# Altium PCB 2331new.PcbDoc
Units mm, origin at the board's own origin, x right, y up, seen from the top; angles counter-clockwise.
Board outline 105 x 90 mm, 2 copper layers (Top Layer, Bottom Layer); 19 components, 48 nets, 138 pads, 6 vias.
Unrouted connection lines stored in the file: 14.
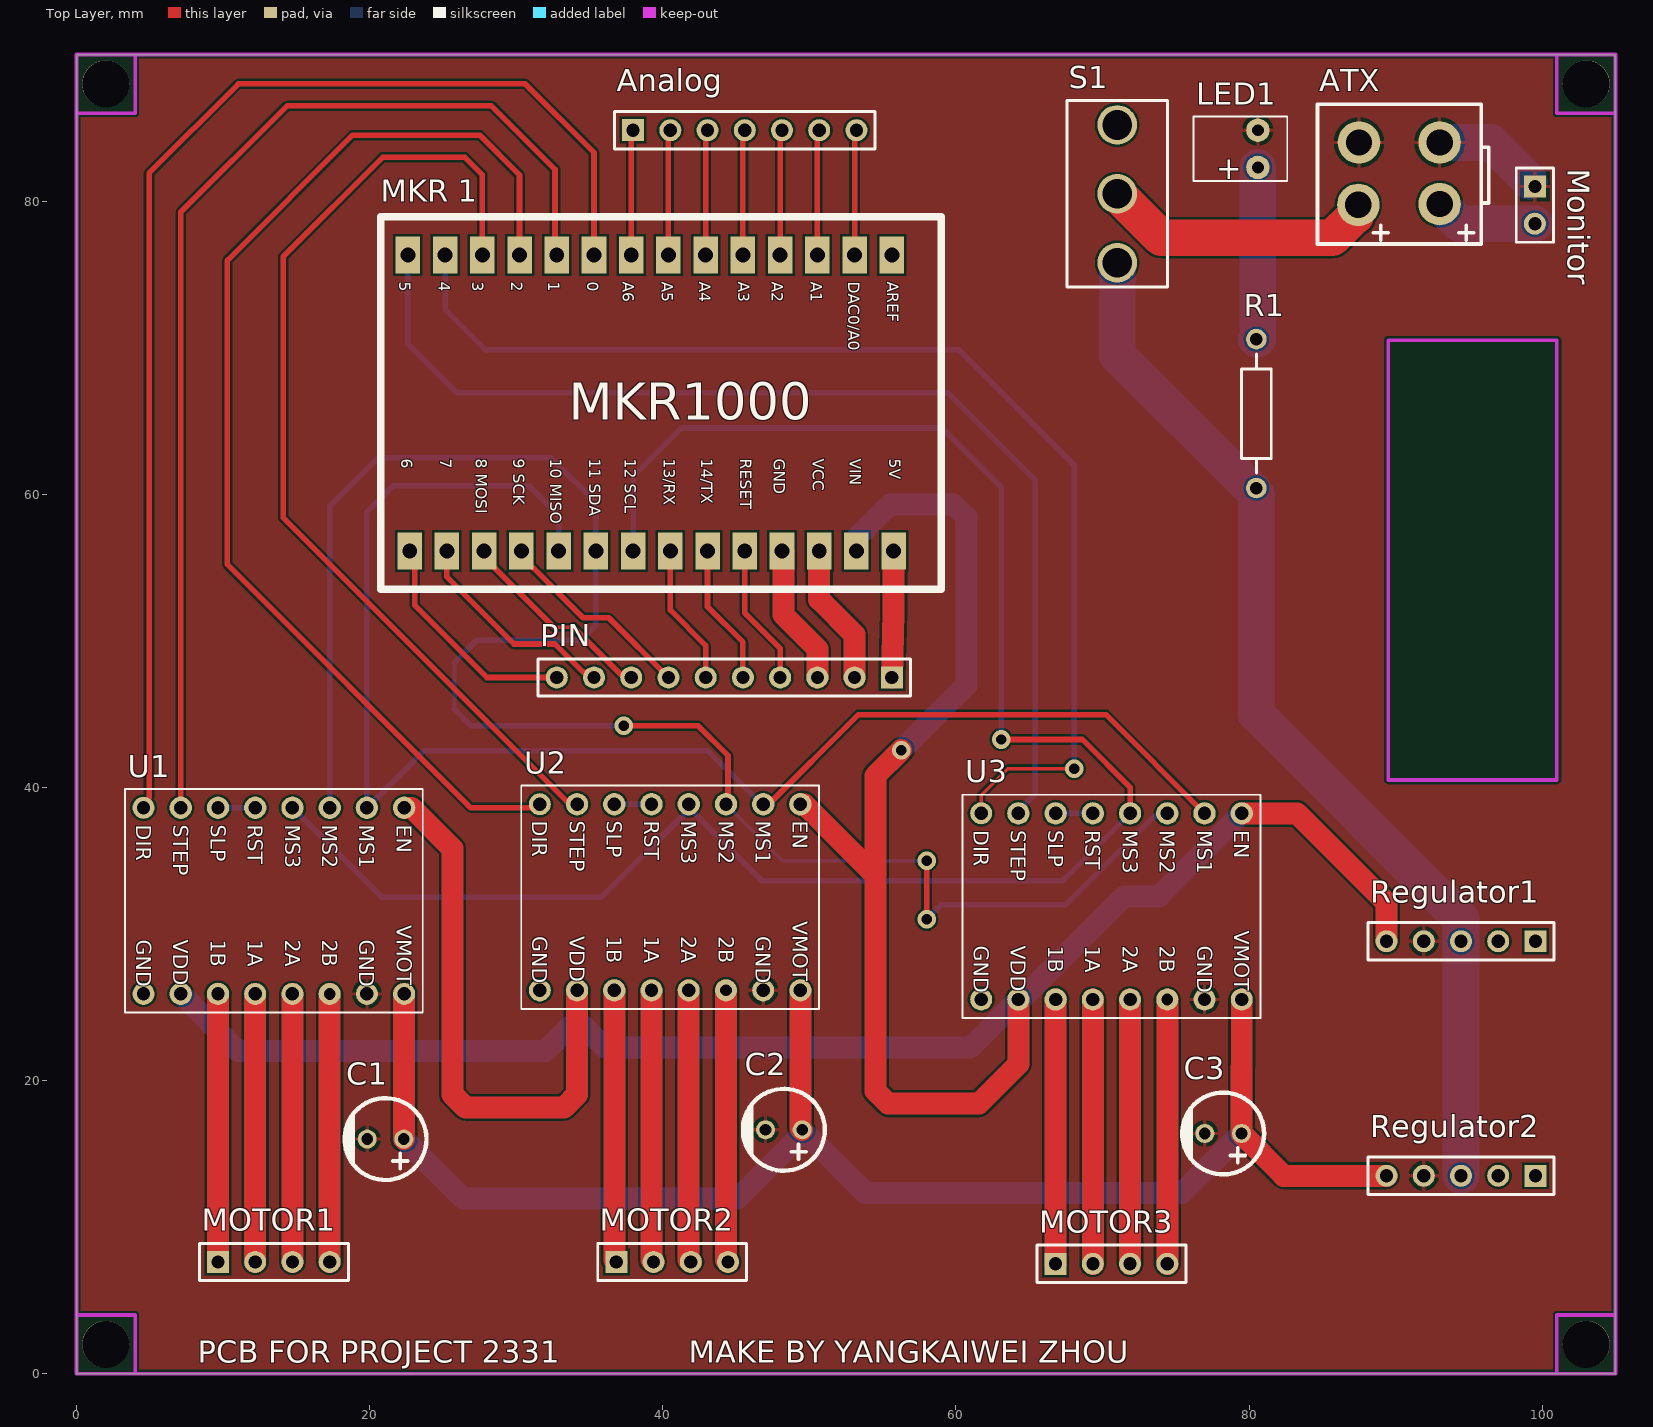
[diagram p0: Top Layer view]
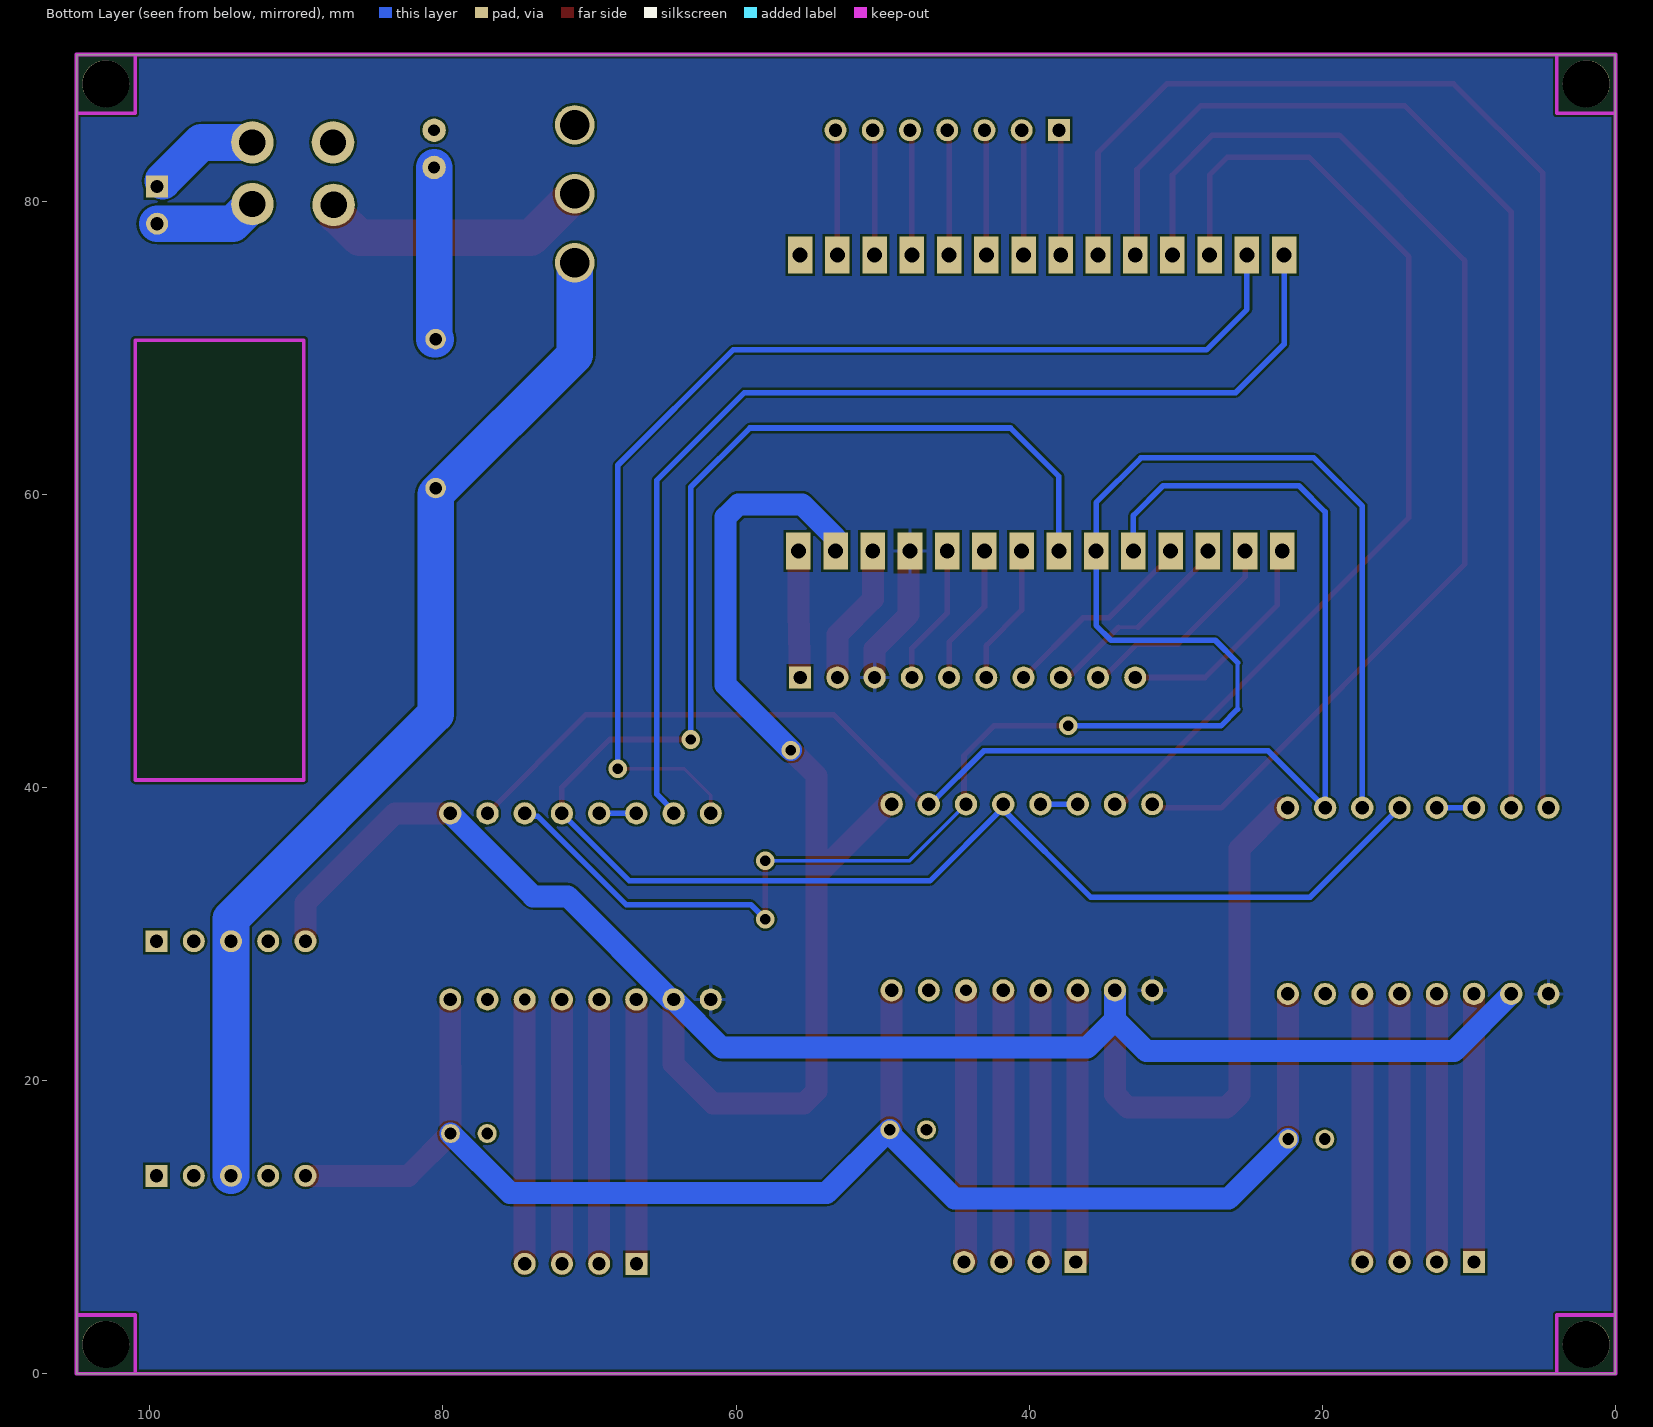
[diagram p1: Bottom Layer view, seen from below]

## Layer stack, top to bottom
Top Solder: solder mask 0.0102, Solder Resist, Dk 3.5
Top Layer: signal copper 0.0356
Dielectric 1: dielectric 0.32, FR-4, Dk 4.8
Bottom Layer: signal copper 0.0356
Bottom Solder: solder mask 0.0102, Solder Resist, Dk 3.5

## Board outline
0,0 0,90 105,90 105,0

## Design rules (kind name [scope] priority, off if disabled: settings)
Clearance [All] p1: gap=0.152 ignorepadtopadclearanceinfootprint=FALSE
MinimumSolderMaskSliver [All] p1: minsoldermaskwidth=0.102
PolygonConnect [All] p1: connectstyle=Relief reliefconductorwidth=0.254 reliefentries=4 polygonreliefangle="90 Angle" airgapwidth=0.254
RoutingVias [All] p1: holewidth=0.711 width=1.27 viastyle="Through Hole" minholewidth=0.711 minwidth=1.27 maxholewidth=0.711 maxwidth=1.27
SilkToSilkClearance [All] p1: silktosilkclearance=0.102
SilkToSolderMaskClearance [IsPad] p1: minsilkscreentomaskgap=0.102 clearancetoexposedcopper=TRUE
SolderMaskExpansion [All] p1: expansion=0.102 istentingtop=FALSE
Width BATTERY [InNetClass('BATTERY')] p1: maxlimit=2.5 minlimit=2.5 preferedwidth=2.5
Width POWER [InNetClass('POWER')] p2: maxlimit=1.5 minlimit=1.5 preferedwidth=1.5
Width [All] p3: maxlimit=0.508 minlimit=0.254 preferedwidth=0.381
27 further rules are at their usual default settings.

## Classes and differential pairs
net class BATTERY: GNDP NetATX_3 NetLED1_1 VP1 VPO
net class POWER: 5V 12V "NetMKR 1_26" "NetMKR 1_28" NetMOTOR1_1 NetMOTOR1_2 NetMOTOR1_3 NetMOTOR1_4 NetMOTOR2_1 NetMOTOR2_2 NetMOTOR2_3 NetMOTOR2_4 NetMOTOR3_1 NetMOTOR3_2 NetMOTOR3_3 NetMOTOR3_4 SGND

## Components (designator, comment, footprint, x,y, rotation, side; value= is the part's Value field where it differs from the comment)
Analog "Header 7" HDR1X7 37.973,84.836 r0 top
ATX "ATX 4" ATX4 90.251,81.9 r0 top
C1 "C43803" C43803 21.082,16.002 r180 top value=100uF
C2 "C43803" C43803 48.26,16.637 r180 top value=100uF
C3 "C43803" C43803 78.232,16.383 r180 top value=100uF
LED1 "LED1" LED 80.304,83.566 r180 top
"MKR 1" "MKR 1000" MKR1000 39.179,66.23 r270 top
Monitor "Header 2" HDR1X2 99.5,81 r270 top
MOTOR1 "Header 1 x 4" HDR1X4 9.652,7.62 r0 top
MOTOR2 "Header 1 x 4" HDR1X4 36.83,7.62 r0 top
MOTOR3 "Header 1 x 4" HDR1X4 66.802,7.493 r0 top
PIN "Header 10" HDR1X10 55.626,47.498 r180 top
R1 "Res2" AXIAL-0.4 80.5,65.5 r270 top value=1K
Regulator1 "Regulator" HDR1X5 99.54,29.5 r180 top
Regulator2 "Regulator" HDR1X5 99.54,13.5 r180 top
S1 "SW-SPDT" SPDT 74.43,74.15 r90 top
U1 "A4988" "A4988 Driver" 13.462,32.258 r270 top
U2 "A4988" "A4988 Driver" 40.5,32.5 r270 top
U3 "A4988" "A4988 Driver" 70.612,31.877 r270 top

## Footprints (in the part's own frame and the unit in brackets; to place one, negate y for a bottom-side part, rotate by r counter-clockwise, add the part's x,y. Pads: shape width x height; smd on the part's side, far side on the other; paste and mask are expansions set on the pad)
"A4988 Driver" [mil]
  round 60 hole 36: 1(-250,350) 2(-250,250) 3(-250,150) 4(-250,50) 5(-250,-50) 6(-250,-150) 7(-250,-250) 10(250,-250) 11(250,-150)
  round 59.05 hole 36: 8(-250,-350) 9(250,-350) 12(250,-50) 13(250,50) 15(250,250) 16(250,350)
  round 59.05 hole 31.5: 14(250,150)
  silkscreen extent -300,-400 300,400
ATX4 [mil]
  round 114.21 hole 70.79: 1(-110,-85) 2(-108.25,82.7) 3(108.25,-82.7) 4(108.25,82.7)
  silkscreen extent -220,-190 240,185
AXIAL-0.4 [mm] "Axial Device, Thru-Hole; 2 Leads; 0.4 in Pin Spacing"
  round 1.4 hole 0.85: 1(-5.08,0) 2(5.08,0)
  silkscreen extent -4.06,-1.02 4.06,1.02
C43803 [mm] "Polarized Capacitor with 16V 5*7"
  round 1.3 hole 0.8: 1(-1.25,0) 2(1.25,0)
  silkscreen extent -2.79,-2.79 2.79,2.79
HDR1X2 [mm] "Connector; Header; 2 Position"
  rect 1.5x1.5 hole 0.9: 1(0,0)
  round 1.5 hole 0.9: 2(2.54,0)
  silkscreen extent -1.27,-1.27 3.81,1.27
HDR1X4 [mm] "Connector; Header; 4 Position"
  rect 1.5x1.5 hole 0.9: 1(0,0)
  round 1.5 hole 0.9: 2(2.54,0) 3(5.08,0) 4(7.62,0)
  silkscreen extent -1.27,-1.27 8.89,1.27
HDR1X5 [mm]
  rect 1.5x1.5 hole 0.9: 1(0,0)
  round 1.5 hole 0.9: 2(2.54,0) 3(5.08,0) 4(7.62,0) 5(10.16,0)
  silkscreen extent -1.27,-1.27 11.43,1.27
HDR1X7 [mm] "Connector; Header; 7 Position"
  rect 1.5x1.5 hole 0.9: 1(0,0)
  round 1.5 hole 0.9: 2(2.54,0) 3(5.08,0) 4(7.62,0) 5(10.16,0) 6(12.7,0) 7(15.24,0)
  silkscreen extent -1.27,-1.27 16.51,1.27
HDR1X10 [mm] "Connector; Header; 10 Position"
  rect 1.5x1.5 hole 0.9: 1(0,0)
  round 1.5 hole 0.9: 2(2.54,0) 3(5.08,0) 4(7.62,0) 5(10.16,0) 6(12.7,0) 7(15.24,0) 8(17.78,0) 9(20.32,0) 10(22.86,0)
  silkscreen extent -1.27,-1.27 24.13,1.27
LED [mm]
  round 1.6 hole 0.8: 1(-0.3,1.27) 2(-0.3,-1.27)
  silkscreen extent -2.3,-2.2 4.1,2.2
MKR1000 [mil]
  rect 100x66 hole 40: 1(-397.5,647.5) 2(-397.5,547.5) 3(-397.5,447.5) 4(-397.5,347.5) 5(-397.5,247.5) 6(-397.5,147.5) 7(-397.5,47.5) 8(-397.5,-52.5) 9(-397.5,-152.5) 10(-397.5,-252.5) 11(-397.5,-352.5) 12(-397.5,-452.5) 13(-397.5,-552.5) 14(-397.5,-652.5) 15(397.5,-647.5) 16(397.5,-547.5) 17(397.5,-447.5) 18(397.5,-347.5) 19(397.5,-247.5) 20(397.5,-147.5) 21(397.5,-47.5) 22(397.5,52.5) 23(397.5,152.5) 24(397.5,252.5) 25(397.5,352.5) 26(397.5,452.5) 27(397.5,552.5) 28(397.5,652.5)
  silkscreen extent -500,-725 500,780
SPDT [mm]
  round 2.7 hole 2.03: 1(11.05,3.43) 2(6.35,3.43) 3(1.65,3.43)
  silkscreen extent 0,0 12.7,6.86

## Part data
Analog: "Header, 7-Pin", LatestRevisionDate=17-Jul-2002, LatestRevisionNote="Re-released for DXP Platform.", Publisher="Altium Limited"
ATX: "ATX 4Pins power connector"
C1 C2 C3: "Polarized Capacitor C43803 100uF", LatestRevisionDate=29-May-2009, LatestRevisionNote="IPC-7351 Footprint Added.", PackageDescription="Chip Capacitor", PackageReference=C0805, Published=8-Jun-2000, Publisher="Altium Limited"
LED1: "Typical RED GaAs LED", LatestRevisionDate=08-Jul-2005, LatestRevisionNote="Mech Layer 1 removed.", PackageDescription="LED; 2 Leads", PackageReference=LED-1, Published=8-Jun-2000, Publisher="Altium Limited"
"MKR 1": library part "Arduino MKR 1000", "Arduino wifi"
Monitor: "Header, 2-Pin", LatestRevisionDate=17-Jul-2002, LatestRevisionNote="Re-released for DXP Platform.", Publisher="Altium Limited"
MOTOR1 MOTOR2 MOTOR3: "Header, 4-Pin", LatestRevisionDate=17-Jul-2002, LatestRevisionNote="Re-released for DXP Platform.", Publisher="Altium Limited"
PIN: "Header, 10-Pin", LatestRevisionDate=17-Jul-2002, LatestRevisionNote="Re-released for DXP Platform.", Publisher="Altium Limited"
R1: "Resistor", LatestRevisionDate=17-Jul-2002, LatestRevisionNote="Re-released for DXP Platform.", PackageDescription="Axial Device, Thru-Hole; 2 Leads; 0.4 in Pin Spacing", PackageReference=AXIAL-0.4, Published=8-Jun-2000, Publisher="Altium Limited"
Regulator1 Regulator2: library part Header1x5, "Voltage Regulator D24V25F5", LatestRevisionDate=17-Jul-2002, LatestRevisionNote="Re-released for DXP Platform.", Publisher="Altium Limited"
S1: "SPDT Subminiature Toggle Switch, Right Angle Mounting, Vertical Actuation", ComponentLink1Description="Manufacturer Link", ComponentLink1URL=http://www.apem.com, DatasheetVersion=05-Dec-2000, LatestRevisionDate=17-Dec-2003, LatestRevisionNote="Schematic revised, PCB Footprint replaced.", PackageDescription="Switch; 4 Leads", PackageReference=TL36WW15050, Published=24-Mar-1999, Publisher="Altium Limited"
U1 U2 U3: library part "A4988 Driver", "Motor Driver"

## Free pads (board coordinates)
  round 3.2 hole 3.2: 1(103,2) 2(103,88) 3(2,88) 4(2,2)

## Via types
v1: diameter 1.27, hole 0.711, Top Layer to Bottom Layer, 6 vias

## Nets (pads, with @x,y where several pads share a name; then routed paths per layer and width w, separated by ;. In a path a pad name is that pad's centre, name@x,y a point inside that pad or via, vN(x,y) a via of type N, cw(c..) or ccw(c..) an arc to the next point about the centre after c; other vN are vias at no path point)
5V: "MKR 1.27" Regulator1.5 U1.1 U1.10 U2.1 U2.10 U3.1 U3.10 | length 210.2
  Top Layer w1.5: U1.1 22.357,38.603 22.865,38.603 25.654,35.814 25.654,19.04 26.533,18.161 33.271,18.161 34.15,19.04 U2.10 ; U2.1 49.395,38.845 49.655,38.845 54.5,34 ; v1(56.261,42.545) 54.5,40.784 54.5,34 ; U3.10 64.262,21.116 61.564,18.419 55.379,18.419 54.5,19.297 54.5,34 ; U3.1 83.273,38.227 89.38,32.12 Regulator1.5
  Bottom Layer w1.5: U1.10 11.02,22 32,22 34.15,24.15 ; U2.10 34.15,24.15 ; 53.213,57.023 55.499,59.309 59.827,59.309 60.706,58.43 60.706,46.99 v1(56.261,42.545) ; U3.1 73.842,32.567 71.488,32.567 64.453,25.532 64.267,25.532 U3.10 60.973,22.238 36.062,22.238 34.15,24.15
12V: C1.1 C2.1 C3.1 Regulator2.5 U1.16 U2.16 U3.16 | length 104.6
  Top Layer w1.5: C1.1 22.352,16.002 U1.16 ; U2.16 49.39,16.757 C2.1 ; U3.16 79.502,20.95 79.482,20.93 C3.1 82.365,13.5 Regulator2.5
  Bottom Layer w1.5: C1.1 26.396,11.938 45.085,11.938 C2.1@49.51,16.363 ; C2.1 C2.1@49.609,16.538 ; C3.1 75.418,12.319 53.828,12.319 C2.1@49.609,16.538 ; C2.1@49.403,16.383 C2.1@49.593,16.526 ; C2.1@49.403,16.383 C2.1@49.46,16.372 ; C2.1@49.403,16.383 C2.1@49.46,16.372 ; C2.1@49.403,16.383 C2.1@49.593,16.526 ; C2.1@49.461,16.372 C2.1@49.51,16.363 ; C2.1@49.46,16.372 C2.1@49.51,16.363 ; C2.1@49.593,16.526 C2.1@49.609,16.538 ; C2.1@49.593,16.526 C2.1@49.609,16.538
D1: "MKR 1.9" U1.8 | length 84.4
  Top Layer w0.381: 4.953,39.292 4.953,81.915 11.038,88 30.618,88 35.306,83.312 35.306,76.327
D2: "MKR 1.11" U2.8 | length 79.1
  Top Layer w0.381: 30.226,76.327 30.226,81.788 27.514,84.5 18.841,84.5 10.287,75.946 10.287,55.213 26.892,38.608 U2.8@31.75,38.608
D3: "MKR 1.13" U3.8 | length 80.1
  Top Layer w0.254: U3.8 61.722,39.467 63.53,41.275 v1(68.072,41.275)
  Bottom Layer w0.381: 25.146,76.327 25.146,72.613 27.909,69.85 60.198,69.85 68.072,61.976 v1(68.072,41.275)
GNDP: ATX.2 ATX.4 C1.2 C2.2 C3.2 LED1.2 Monitor.1 Regulator1.4 Regulator2.4 U1.15 U2.15 U3.15 | length 7.2
  Bottom Layer w2.5: ATX.4 96.5,84 Monitor.1@99.125,81.375
MS1: "MKR 1.19" U1.2 U2.2 U3.2 | length 103.1
  Top Layer w0.381: U2.2@46.99,38.608 53.34,44.958 70.231,44.958 U3.2
  Bottom Layer w0.381: 32.893,56.134 32.893,58.547 30.861,60.579 21.59,60.579 19.812,58.801 U1.2 23.704,42.5 43.098,42.5 46.799,38.799 U2.2@46.99,38.608
MS2: "MKR 1.20" U1.3 U2.3 U3.3 | length 126.4
  Top Layer w0.381: v1(37.338,44.196) 42.418,44.196 44.45,42.164 U2.3@44.45,38.608 ; v1@57.839,35 v1(58,35) v1(58,31)
  Bottom Layer w0.254: 25.781,45.339 25.781,48.514 ; U2.3@44.31,38.292 U2.3 48.16,35 v1@57.839,35 ; U3.3@74.215,38.02 U3.3
  Bottom Layer w0.381: U1.3 17.272,59.182 20.574,62.484 32.385,62.484 35.433,59.436 35.433,56.134 35.433,51.054 34.417,50.038 27.305,50.038 25.781,48.514 ; 25.781,45.339 26.924,44.196 v1(37.338,44.196) ; v1(58,31) 59,32 67.5,32 73.52,38.02 U3.3@74.215,38.02
MS3: "MKR 1.21" U1.4 U2.4 U3.4 | length 128.6
  Top Layer w0.381: v1(63.097,43.265) 68.622,43.265 71.882,40.005 U3.4
  Bottom Layer w0.381: U1.4 20.828,32.512 35.814,32.512 41.91,38.608 41.91,38.481 46.771,33.62 67.275,33.62 U3.4 ; 37.973,56.134 37.973,61.214 41.275,64.516 59.055,64.516 63.097,60.474 v1(63.097,43.265)
NetAnalog_1: "MKR 1.8" Analog.1 | length 8.8
  Top Layer w0.381: 37.846,76.327 Analog.1@37.846,85.09
NetAnalog_2: "MKR 1.7" Analog.2 | length 8.8
  Top Layer w0.381: 40.386,76.327 Analog.2@40.386,85.09
NetAnalog_3: "MKR 1.6" Analog.3 | length 8.8
  Top Layer w0.381: 42.926,76.327 Analog.3@42.926,85.09
NetAnalog_4: "MKR 1.5" Analog.4 | length 8.8
  Top Layer w0.381: 45.466,76.327 Analog.4@45.466,85.09
NetAnalog_5: "MKR 1.4" Analog.5 | length 8.8
  Top Layer w0.381: 48.006,76.327 Analog.5@48.006,85.09
NetAnalog_6: "MKR 1.3" Analog.6 | length 8.8
  Top Layer w0.381: 50.546,76.327 50.546,84.963 Analog.6@50.673,85.09
NetAnalog_7: "MKR 1.2" Analog.7 | length 8.8
  Top Layer w0.381: 53.086,76.327 Analog.7@53.086,85.09
NetATX_3: ATX.3 Monitor.2 | length 7.1
  Bottom Layer w2.5: ATX.3 94.339,78.46 Monitor.2
NetLED1_1: LED1.1 R1.1 | length 11.8
  Bottom Layer w2.5: R1.1 80.604,70.58 LED1.1
"NetMKR 1_15": "MKR 1.15" PIN.10 | length 15.6
  Top Layer w0.381: 22.733,56.134 23.081,55.786 23.081,52.419 28.002,47.498 PIN.10
"NetMKR 1_16": "MKR 1.16" PIN.9 | length 14.7
  Top Layer w0.381: 25.273,56.134 25.273,54.356 29.845,49.784 32.639,49.784 34.562,47.861 34.64,47.861 35.003,47.498 PIN.9
"NetMKR 1_17": "MKR 1.17" PIN.8 | length 13.9
  Top Layer w0.254: 32.59,50.927 33.909,50.927 ; 37.1,47.736 37.608,47.736 PIN.8
  Top Layer w0.381: 27.813,56.134 27.813,55.702 28.461,55.054 28.463,55.054 32.59,50.927 ; 33.909,50.927 37.1,47.736
"NetMKR 1_18": "MKR 1.18" PIN.7 | length 13.9
  Top Layer w0.254: 30.353,56.134 30.353,55.702 31.064,54.991 31.138,54.991
  Top Layer w0.381: 31.138,54.991 34.557,51.571 36.313,51.571 PIN.7
"NetMKR 1_22": "MKR 1.22" PIN.6 | length 9.6
  Top Layer w0.381: 40.513,56.134 40.513,52.094 42.926,49.681 PIN.6
"NetMKR 1_23": "MKR 1.23" PIN.5 | length 9.6
  Top Layer w0.381: 43.053,56.134 43.053,52.324 45.466,49.911 PIN.5
"NetMKR 1_24": "MKR 1.24" PIN.4 | length 9.6
  Top Layer w0.381: 45.593,56.134 45.593,51.907 48.006,49.494 PIN.4
"NetMKR 1_26": "MKR 1.26" PIN.2 | length 9.6
  Top Layer w1.5: 50.673,56.134 50.673,52.827 53.086,50.414 PIN.2
"NetMKR 1_28": "MKR 1.28" PIN.1 | length 8.6
  Top Layer w1.5: PIN.1 55.753,51.943 55.753,56.134
NetMOTOR1_1: MOTOR1.1 U1.11 | length 18.3
  Top Layer w1.5: MOTOR1.1 U1.11
NetMOTOR1_2: MOTOR1.2 U1.12 | length 18.3
  Top Layer w1.5: MOTOR1.2 U1.12
NetMOTOR1_3: MOTOR1.3 U1.13 | length 18.3
  Top Layer w1.5: MOTOR1.3 U1.13
NetMOTOR1_4: MOTOR1.4 U1.14 | length 18.3
  Top Layer w1.5: MOTOR1.4 U1.14
NetMOTOR2_1: MOTOR2.1 U2.11 | length 18.6
  Top Layer w1.5: U2.11 36.69,7.76 MOTOR2.1
NetMOTOR2_2: MOTOR2.2 U2.12 | length 18.6
  Top Layer w1.5: U2.12 39.23,7.76 MOTOR2.2
NetMOTOR2_3: MOTOR2.3 U2.13 | length 18.6
  Top Layer w1.5: U2.13 41.77,7.76 MOTOR2.3
NetMOTOR2_4: MOTOR2.4 U2.14 | length 18.6
  Top Layer w1.5: U2.14 44.31,7.76 MOTOR2.4
NetMOTOR3_1: MOTOR3.1 U3.11 | length 18
  Top Layer w1.5: MOTOR3.1 U3.11
NetMOTOR3_2: MOTOR3.2 U3.12 | length 18
  Top Layer w1.5: MOTOR3.2 U3.12
NetMOTOR3_3: MOTOR3.3 U3.13 | length 18
  Top Layer w1.5: MOTOR3.3 U3.13
NetMOTOR3_4: MOTOR3.4 U3.14 | length 18
  Top Layer w1.5: MOTOR3.4 U3.14
NetU1_5: U1.5 U1.6 | length 2.5
  Bottom Layer w0.381: U1.6 U1.5
NetU2_5: U2.5 U2.6 | length 2.5
  Bottom Layer w0.381: U2.6 U2.5
NetU3_5: U3.5 U3.6 | length 2.5
  Bottom Layer w0.381: U3.6 U3.5
S1: "MKR 1.10" U1.7 | length 76.9
  Top Layer w0.381: U1.7 7.112,79.248 14.364,86.5 28.308,86.5 32.646,82.162 32.646,76.447 32.766,76.327
S2: "MKR 1.12" U2.7 | length 68.3
  Top Layer w0.381: 27.686,76.327 27.686,81.788 26.474,83 20.897,83 14.097,76.2 14.097,58.403 33.431,39.069 33.931,39.069 U2.7
S3: "MKR 1.14" U3.7 | length 75.9
  Bottom Layer w0.381: 22.606,76.327 22.606,70.231 25.908,66.929 59.436,66.929 65.405,60.96 65.405,39.53 64.262,38.387 U3.7
SGND: "MKR 1.25" PIN.3 U1.9 U2.9 U3.9 | length 9.6
  Top Layer w1.5: 48.133,56.134 48.221,56.046 48.221,51.779 50.546,49.454 PIN.3
VP1: ATX.1 S1.2 | length 18.2
  Top Layer w2.5: S1.2 74,77.5 85.686,77.5 87.18,78.994 ATX.1@87.289,78.994
VPO: R1.2 Regulator1.3 Regulator2.3 S1.3 | length 72
  Bottom Layer w2.5: S1.3 71,69.5 80.29,60.21 80.5,60 80.5,45 94.464,31.036 94.464,29.5 94.464,13.504 Regulator2.3
pads on no net: "MKR 1.1" Regulator1.1 Regulator1.2 Regulator2.1 Regulator2.2 S1.1

## Polygon pours and split planes (outlines as drawn)
GNDP on Top Layer "GNDP_L01_P000" (solid, remove dead copper, pour order 0): 0,0 0,90 105,90 105,0
SGND on Bottom Layer "SGND_L02_P001" (solid, remove dead copper, pour order 1): 0,0 0,90 105,90 105,0

## Keep-outs
Keep-Out Layer:
  lines w0.254: 0,4 4,4 4,0 ; 0,86 4,86 4,90 ; 101,0 101,4 105,4 ; 101,90 101,86 105,86 ; 0,0 0,90 105,90 105,0 0,0 ; 89.5,40.5 89.5,70.5 101,70.5 101,40.5 89.5,40.5

## Silkscreen, mask and mechanical layers (free items; w line width, h text height)
Top Overlay:
  text "+" at 77.754,81.5 h1.52
  text "PCB FOR PROJECT 2331" at 8.254,0.754 h1.52
  text "MAKE BY YANGKAIWEI ZHOU" at 41.754,0.754 h1.52

## Text inside footprints (layer, text, board x,y; h text height)
"MKR 1": Top Overlay "MKR1000" at 33.591,65.087 h2.54; Top Overlay "AREF" at 55.308,74.486 h0.76 r270; Top Overlay "DAC0/A0" at 52.642,74.486 h0.76 r270; Top Overlay "A2" at 47.434,74.486 h0.76 r270; Top Overlay "A1" at 50.102,74.486 h0.76 r270; Top Overlay "A5" at 39.941,74.486 h0.76 r270; Top Overlay "A6" at 37.274,74.486 h0.76 r270; Top Overlay "A4" at 42.481,74.486 h0.76 r270; Top Overlay "A3" at 45.148,74.486 h0.76 r270; Top Overlay "4" at 24.701,74.486 h0.76 r270; Top Overlay "5" at 22.034,74.486 h0.76 r270; Top Overlay "2" at 29.654,74.486 h0.76 r270; Top Overlay "3" at 26.987,74.486 h0.76 r270; Top Overlay "1" at 32.194,74.486 h0.76 r270; Top Overlay "0" at 34.861,74.486 h0.76 r270; Top Overlay "11 SDA" at 34.989,62.42 h0.76 r270; Top Overlay "10 MISO" at 32.322,62.42 h0.76 r270; Top Overlay "8 MOSI" at 27.241,62.42 h0.76 r270; Top Overlay "9 SCK" at 29.781,62.42 h0.76 r270; Top Overlay "6" at 22.162,62.42 h0.76 r270; Top Overlay "7" at 24.828,62.42 h0.76 r270; Top Overlay "RESET" at 45.276,62.42 h0.76 r270; Top Overlay "14/TX" at 42.608,62.42 h0.76 r270; Top Overlay "12 SCL" at 37.401,62.42 h0.76 r270; Top Overlay "13/RX" at 40.069,62.42 h0.76 r270; Top Overlay "VCC" at 50.228,62.42 h0.76 r270; Top Overlay "GND" at 47.561,62.42 h0.76 r270; Top Overlay "VIN" at 52.768,62.42 h0.76 r270; Top Overlay "5V" at 55.435,62.42 h0.76 r270
U1: Top Overlay "MS1" at 19.304,37.465 h1.02 r270; Top Overlay "MS2" at 16.764,37.465 h1.02 r270; Top Overlay "MS3" at 14.224,37.465 h1.02 r270; Top Overlay "STEP" at 6.604,37.465 h1.02 r270; Top Overlay "DIR" at 4.064,37.465 h1.02 r270; Top Overlay "GND" at 4.064,29.591 h1.02 r270; Top Overlay "VDD" at 6.604,29.591 h1.02 r270; Top Overlay "1B" at 9.144,29.591 h1.02 r270; Top Overlay "1A" at 11.684,29.591 h1.02 r270; Top Overlay "2A" at 14.224,29.591 h1.02 r270; Top Overlay "2B" at 16.764,29.591 h1.02 r270; Top Overlay "GND" at 19.304,29.591 h1.02 r270; Top Overlay "VMOT" at 21.844,30.607 h1.02 r270; Top Overlay "EN" at 21.844,37.465 h1.02 r270; Top Overlay "RST" at 11.684,37.465 h1.02 r270; Top Overlay "SLP" at 9.144,37.465 h1.02 r270
U2: Top Overlay "SLP" at 36.182,37.707 h1.02 r270; Top Overlay "RST" at 38.722,37.707 h1.02 r270; Top Overlay "EN" at 48.882,37.707 h1.02 r270; Top Overlay "VMOT" at 48.882,30.849 h1.02 r270; Top Overlay "GND" at 46.342,29.833 h1.02 r270; Top Overlay "2B" at 43.802,29.833 h1.02 r270; Top Overlay "2A" at 41.262,29.833 h1.02 r270; Top Overlay "1A" at 38.722,29.833 h1.02 r270; Top Overlay "1B" at 36.182,29.833 h1.02 r270; Top Overlay "VDD" at 33.642,29.833 h1.02 r270; Top Overlay "GND" at 31.102,29.833 h1.02 r270; Top Overlay "DIR" at 31.102,37.707 h1.02 r270; Top Overlay "STEP" at 33.642,37.707 h1.02 r270; Top Overlay "MS3" at 41.262,37.707 h1.02 r270; Top Overlay "MS2" at 43.802,37.707 h1.02 r270; Top Overlay "MS1" at 46.342,37.707 h1.02 r270
U3: Top Overlay "SLP" at 66.294,37.084 h1.02 r270; Top Overlay "RST" at 68.834,37.084 h1.02 r270; Top Overlay "EN" at 78.994,37.084 h1.02 r270; Top Overlay "VMOT" at 78.994,30.226 h1.02 r270; Top Overlay "GND" at 76.454,29.21 h1.02 r270; Top Overlay "2B" at 73.914,29.21 h1.02 r270; Top Overlay "2A" at 71.374,29.21 h1.02 r270; Top Overlay "1A" at 68.834,29.21 h1.02 r270; Top Overlay "1B" at 66.294,29.21 h1.02 r270; Top Overlay "VDD" at 63.754,29.21 h1.02 r270; Top Overlay "GND" at 61.214,29.21 h1.02 r270; Top Overlay "DIR" at 61.214,37.084 h1.02 r270; Top Overlay "STEP" at 63.754,37.084 h1.02 r270; Top Overlay "MS3" at 71.374,37.084 h1.02 r270; Top Overlay "MS2" at 73.914,37.084 h1.02 r270; Top Overlay "MS1" at 76.454,37.084 h1.02 r270